# Altium PCB Solar_PowerBoard.PcbDoc
Units mm, origin at the board's own origin, x right, y up, seen from the top; angles counter-clockwise.
Board outline 33.25 x 39.86 mm, 2 copper layers (Top Layer, Bottom Layer), stack 1.639 mm thick; 25 components, 10 nets, 61 pads, 26 vias.
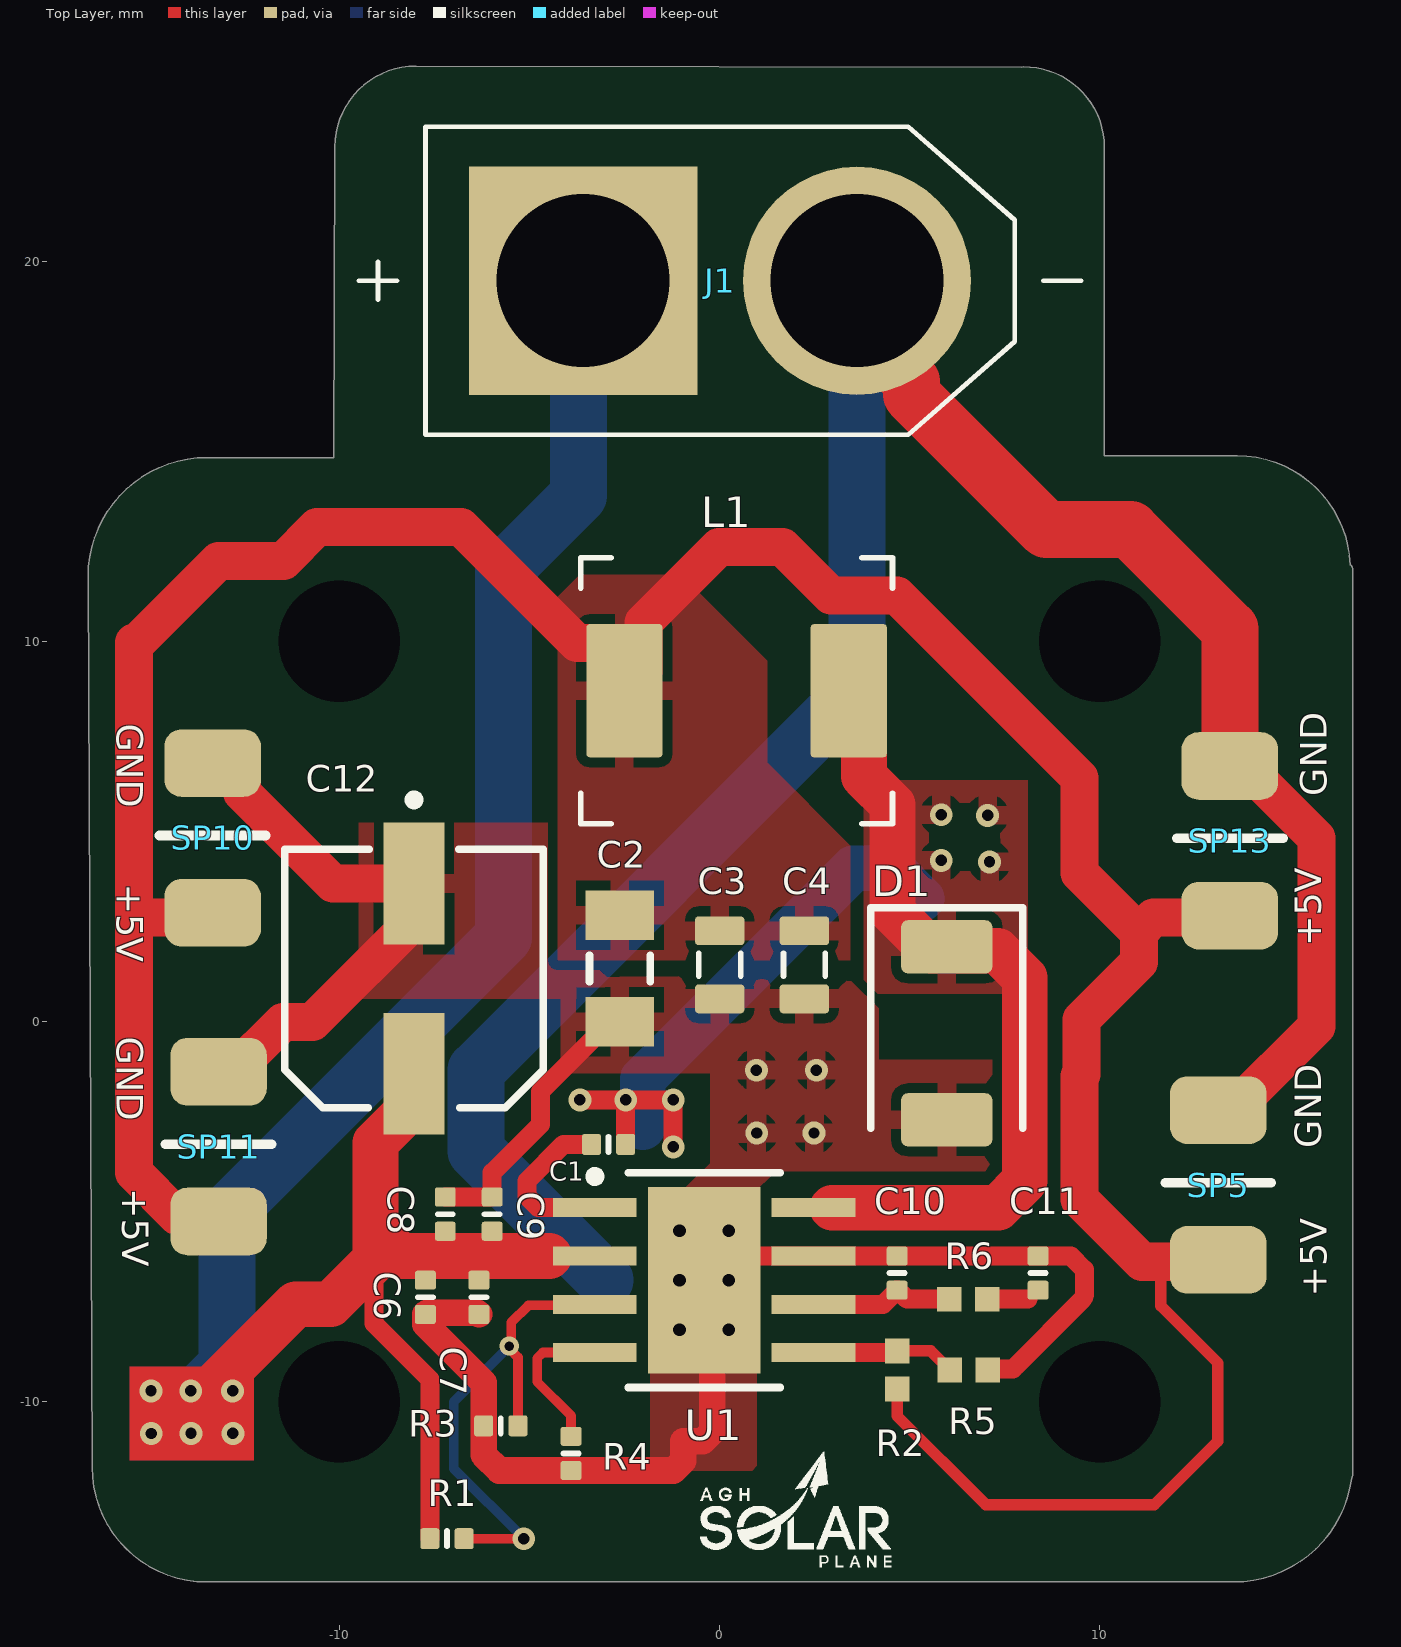
[diagram p0: Top Layer view]
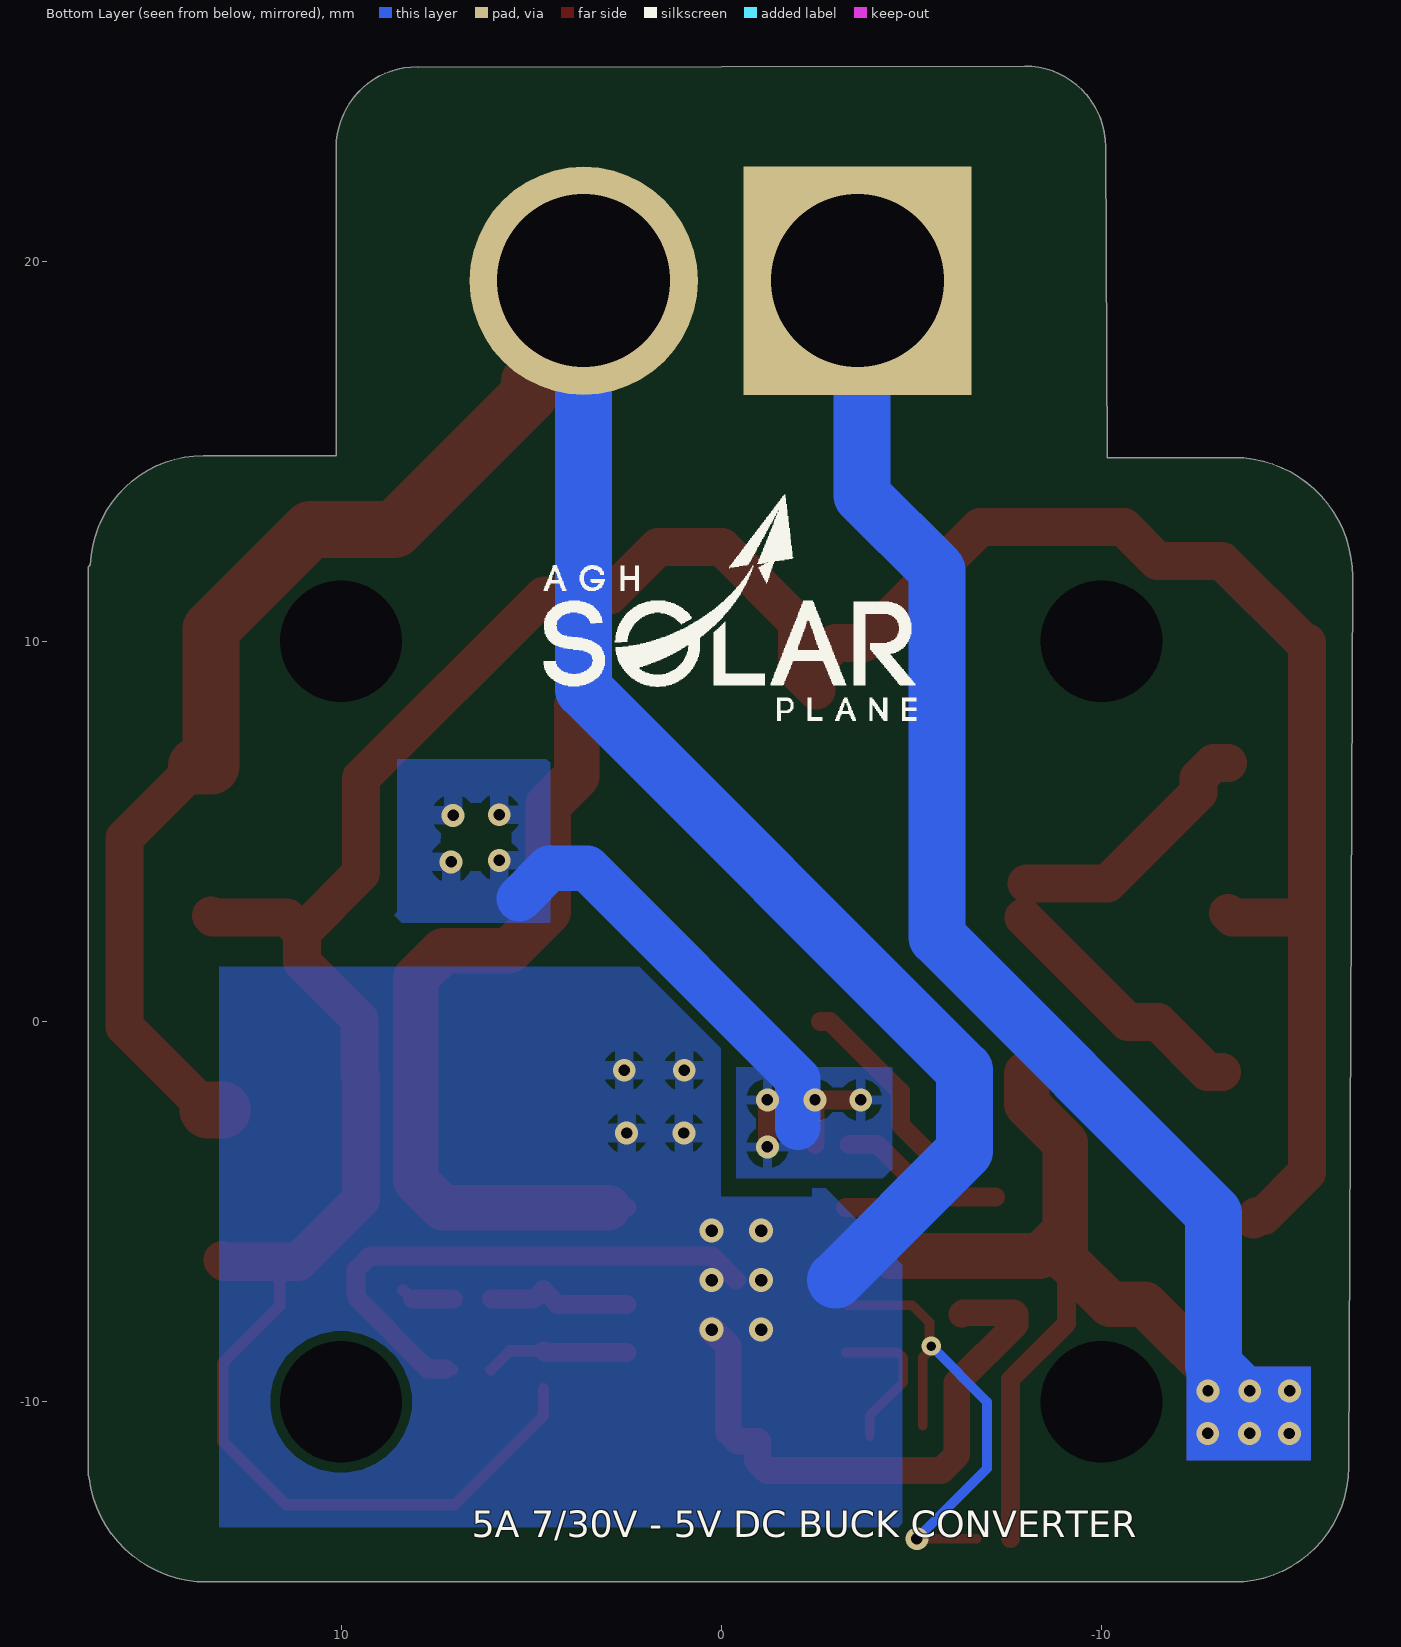
[diagram p1: Bottom Layer view, seen from below]
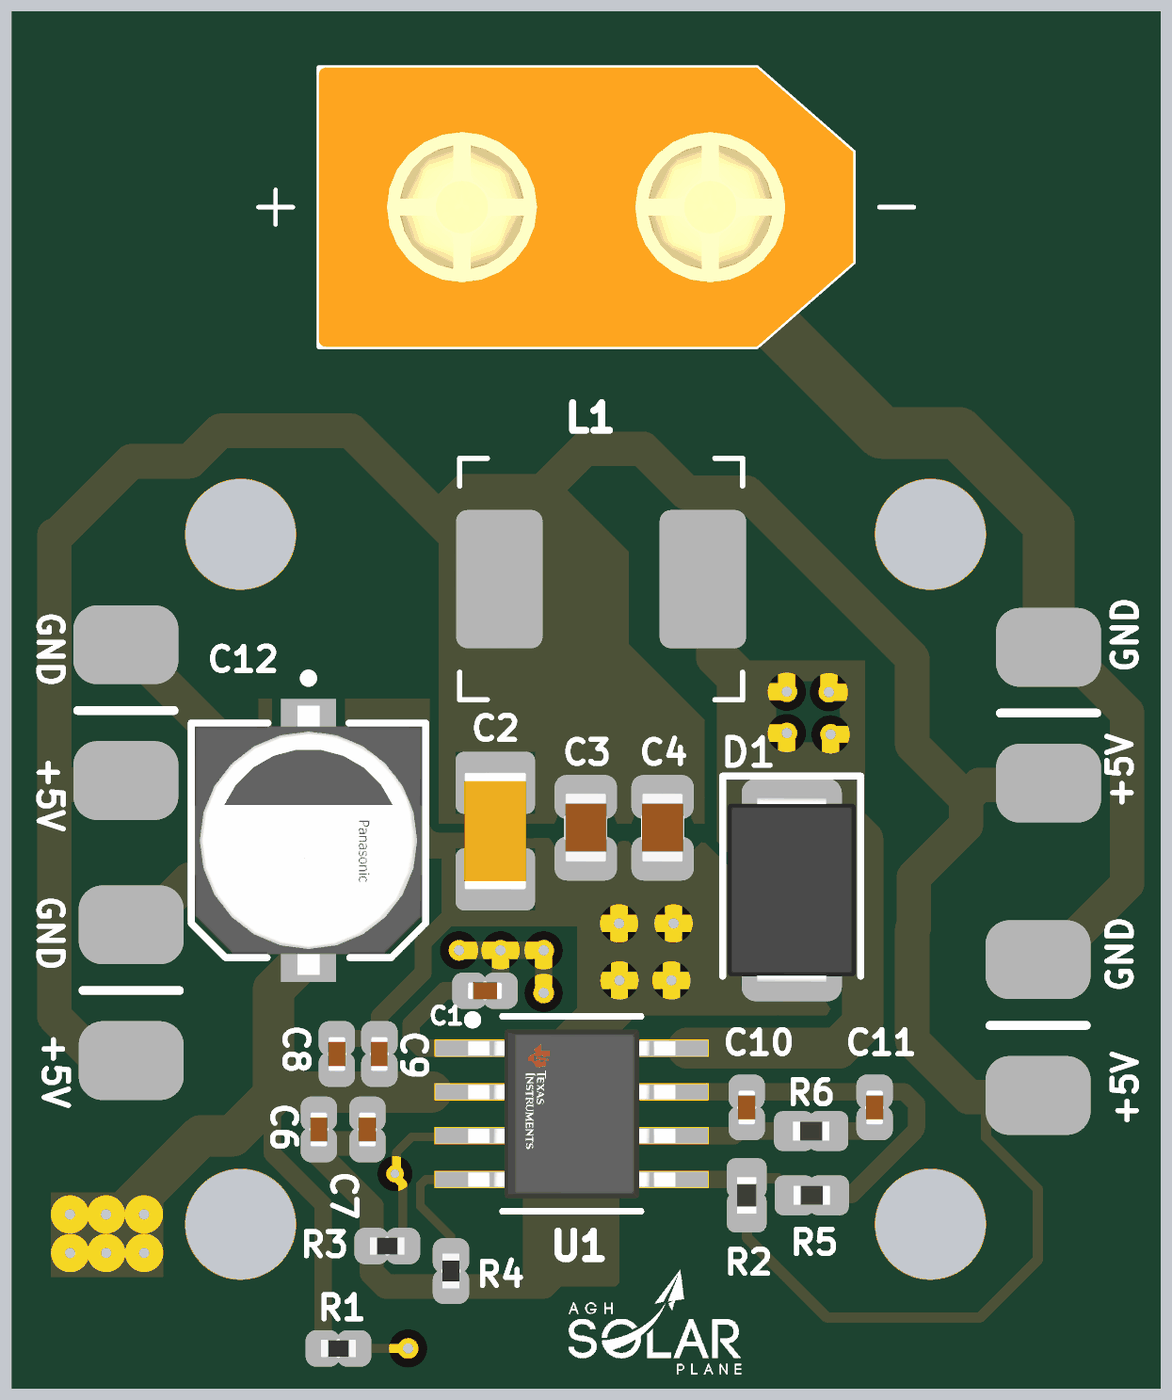
[diagram p2: 3D render of the assembled board from above, using the file's embedded part models]

## Layer stack, top to bottom
Top Solder: solder mask 0.0127, Solder Resist, Dk 3.3
Top Layer: signal copper 0.07
Dielectric1: core 1.4986, FR-4, Dk 4.3
Bottom Layer: signal copper 0.07
Bottom Solder: solder mask 0.0127, Solder Resist, Dk 3.3

## Board outline
-16.496,-11.719 -16.602,11.703 -16.602,11.704 cw(c-13.475,11.704) -13.475,14.832 -10.144,14.832 -10.11,22.995 -10.109,23.01 cw(c-7.981,23) -7.981,25.127 -7.978,25.127 7.953,25.102 7.994,25.109 cw(c8,22.981) 10.127,22.985 10.127,14.877 13.618,14.877 cw(c13.618,11.902) 16.591,12.011 cw(c16.525,11.902) 16.653,11.902 16.653,-11.933 16.627,-12.01 cw(c13.525,-11.61) 13.525,-14.737 -13.477,-14.737 cw(c-13.477,-11.719)

## Design rules (kind name [scope] priority, off if disabled: settings)
Clearance Clearance_1 [All] p1: gap=0.254 ignorepadtopadclearanceinfootprint=FALSE
Clearance [All] p2: gap=0.254 ignorepadtopadclearanceinfootprint=FALSE
DiffPairsRouting [All] p1: maxlimit=0.254 minlimit=0.254 mostfreqgap=0.254 toplayer_minwidth=0.254 toplayer_maxwidth=0.254 toplayer_prefwidth=0.254 bottomlayer_minwidth=0.254 bottomlayer_maxwidth=0.254 bottomlayer_prefwidth=0.254 maxuncoupledlength=12.7
HoleSize [All] p1: absolutevalues=TRUE maxlimit=7.62 minlimit=0.254 maxpercent=80.000 minpercent=20.000
MinimumAnnularRing [All] p1: minimumring=0
PasteMaskExpansion [All] p1: expansion=0.254
PlaneClearance [All] p1: clearance=0.381
PlaneConnect PlaneConnect_2 [All] p1: pad.planeconnectstyle=Relief pad.reliefexpansion=0.508 pad.reliefentries=4 pad.reliefconductorwidth=0.254 pad.reliefairgap=0.254 via.planeconnectstyle=Direct via.reliefexpansion=0.508 via.reliefentries=4 via.reliefconductorwidth=0.254 via.reliefairgap=0.254
PlaneConnect PlaneConnect_1 [All] p2: planeconnectstyle=Relief reliefexpansion=0.508 reliefentries=4 reliefconductorwidth=0.254 reliefairgap=0.254
PlaneConnect [All] p3: pad.planeconnectstyle=Relief pad.reliefexpansion=0.508 pad.reliefentries=4 pad.reliefconductorwidth=0.254 pad.reliefairgap=0.254 via.planeconnectstyle=Direct via.reliefexpansion=0.508 via.reliefentries=4 via.reliefconductorwidth=0.254 via.reliefairgap=0.254
PolygonConnect [InComponent('U1')] p1: connectstyle=Direct reliefconductorwidth=0.5 reliefentries=4 polygonreliefangle="90 Angle" airgapwidth=0.254
PolygonConnect PolygonConnect_1 [All] p2: connectstyle=Relief reliefconductorwidth=0.5 reliefentries=4 polygonreliefangle="90 Angle" airgapwidth=0.254
RoutingVias [All] p1: holewidth=0.5 width=0.508 viastyle="Through Hole" minholewidth=0.2 minwidth=0.2 maxholewidth=1 maxwidth=1
SMDNeckDown [All] p1: percent=100.000
SilkToSolderMaskClearance SilkscreenOverComponentPads [IsPad] p1: minsilkscreentomaskgap=0.254 clearancetoexposedcopper=TRUE
SolderMaskExpansion [All] p1: expansion=0.254 istentingtop=FALSE
SupplyNets "Schematic Supply Nets_2" [InNet('VOUT')] p1: voltage=0.000
SupplyNets "Schematic Supply Nets_1" [InNet('VIN')] p2: voltage=0.000
SupplyNets "Schematic Supply Nets" [InNet('GND')] p3: voltage=0.000
Width [All] p1: maxlimit=3 minlimit=0.254 preferedwidth=0.5 minimp=50.000000 maximp=50.000000 favimp=50.000000
24 further rules are at their usual default settings.

## Components (designator, comment, footprint, x,y, rotation, side; value= is the part's Value field where it differs from the comment)
C1 "Capacitor 100nF +/-20% 25V 0402" CAPC0402(1005)60_L -2.913,-3.231 r180 top value=100nF
C2 "Capacitor 220 uF +/- 10% 16 V 1206" CAPC3216X180X50NL20T25 -2.615,1.397 r90 top value=220µF
C3 "Capacitor 47µF +/-40% 6.3V 0805" CAPC0805(2012)145_L 0.009,1.497 r90 top value=47µF
C4 "Capacitor 47µF +/-40% 6.3V 0805" CAPC0805(2012)145_L 2.234,1.497 r90 top value=47µF
C6 "Capacitor 2,2µF +/-20% 10V 0402" CAPC0402(1005)60_L -7.731,-7.252 r90 top value=2.2µF
C7 "Capacitor 2,2µF +/-20% 10V 0402" CAPC0402(1005)60_L -6.322,-7.252 r90 top value=2.2µF
C8 "Capacitor 2,2µF +/-20% 10V 0402" CAPC0402(1005)60_L -7.208,-5.065 r270 top value=2.2µF
C9 "Capacitor 2,2µF +/-20% 10V 0402" CAPC0402(1005)60_L -5.974,-5.065 r270 top value=2.2µF
C10 "Capacitor 15pF +/-20% 10V 0402" CAPC0402(1005)60_L 4.675,-6.615 r270 top value=15pF
C11 "Capacitor 15pF +/-20% 10V 0402" CAPC0402(1005)60_L 8.382,-6.615 r270 top value=6.8nF
C12 "EEEFT1V101AP" FP-FTD-MFG -8.031,1.128 r270 top
D1 "SK54-3G" SK54-3G 6.162,-0.003 r270 top
J1 "XT60-M" AMASS_XT60-M 0.019,19.482 r0 top
L1 "Inductor 5.6uH" SUSUMU-PCMB063T_V 0.452,8.7 r180 top value=5.6µH
R1 "Resistor 90.9K +/-1 % 0402 63 mW" RESC0402(1005)_L -7.162,-13.6 r180 top value=442k
R2 "Resistor 52.3k +/-1% 0402 100 mW" RESC1005X40X25ML05T05 4.675,-9.162 r270 top value=52.3k
R3 "Resistor 90.9K +/-1 % 0402 63 mW" RESC0402(1005)_L -5.747,-10.632 r0 top value=90.9k
R4 "Resistor 121K +/-1 % 0402 63 mW" RESC0402(1005)_L -3.9,-11.357 r90 top value=121k
R5 "Resistor 10k +/-1% 0402 100 mW" RESC1005X40X25ML05T05 6.559,-9.162 r180 top value=10k
R6 "Resistor 28.7k +/-1% 0402 100 mW" RESC1005X40X25ML05T05 6.542,-7.3 r180 top value=28.7k
SP5 "5VOUT" 5VOUT 13.12,-4.236 r90 top
SP10 "5VOUT" 5VOUT -13.324,4.893 r90 top
SP11 "5VOUT" 5VOUT -13.171,-3.226 r90 top
SP13 "5VOUT" 5VOUT 13.424,4.817 r90 top
U1 "TPS54560DDA" FP-DDA0008E-MFG -0.398,-6.8 r0 top

## Footprints (in the part's own frame and the unit in brackets; to place one, negate y for a bottom-side part, rotate by r counter-clockwise, add the part's x,y. Pads: shape width x height; smd on the part's side, far side on the other; paste and mask are expansions set on the pad)
5VOUT [mil]
  rrect50% 70x100 smd: 1(-80,0) 2(75,0)
  silkscreen extent 0,-55 0,55
AMASS_XT60-M [mm]
  round 6 hole 4.55: N(3.6,0)
  rect 6x6 / inner round 6 / far side rect 6x6 hole 4.55: P(-3.6,0)
  silkscreen extent -9.5,-4.05 9.5,4.05, body extent -7.75,-4.05 7.75,4.05, height 16
CAPC0402(1005)60_L [mm] "Chip Capacitor, Body 1.0x0.5mm, Height 0.6mm, IPC High Density"
  rrect25% 0.5x0.55 smd: 1(-0.45,0) 2(0.45,0)
  silkscreen extent 0,-0.2 0,0.2, body extent -0.5,-0.25 0.5,0.25, height 0.6
CAPC0805(2012)145_L [mm] "Chip Capacitor, Body 2.0x1.2mm, Height 1.45mm, IPC High Density"
  rrect25% 0.76x1.3 smd: 1(-0.9,0) 2(0.89,0)
  silkscreen extent -0.3,-0.55 0.3,0.55, body extent -1,-0.6 1,0.6, height 1.45
CAPC3216X180X50NL20T25 [mm] "Chip Capacitor, 2-Leads, Body 3.40x1.80mm, IPC Medium Density"
  rect 1.3x1.8 smd: 1(-1.4,0) 2(1.4,0)
  silkscreen extent -0.35,-0.8 0.35,0.8, body extent -1.7,-0.9 1.7,0.9, height 1.8
FP-DDA0008E-MFG [mm]
  rect 2.2x0.5 smd paste-1000 mask+0: 1(-2.875,1.905) 2(-2.875,0.635) 3(-2.875,-0.635) 4(-2.875,-1.905) 5(2.875,-1.905) 6(2.875,-0.635) 7(2.875,0.635) 8(2.875,1.905)
  rect 2.95x4.9 smd paste-1000 mask-1000: 9(0,0)
  silkscreen extent -3,-2.83 2,2.85, body extent -4.08,-2.68 4.08,2.68, height 0.25
FP-FTD-MFG [mm]
  rect 3.2x1.6 smd paste+0 mask+0: 1(-2.5,0) 2(2.5,0)
  silkscreen extent -4.82,-3.4 3.4,3.4, body extent -4.35,-3.65 4.35,3.65, height 0.25
RESC0402(1005)_L [mm] "Chip Resistor, Body 1.0x0.5mm, IPC High Density"
  rrect25% 0.5x0.55 smd: 1(-0.45,0) 2(0.45,0)
  silkscreen extent 0,-0.2 0,0.2, body extent -0.5,-0.25 0.5,0.25, height 0.3
RESC1005X40X25ML05T05 [mm] "Chip Resistor, 2-Leads, Body 1.05x0.55mm, IPC Low Density"
  rect 0.65x0.65 smd: 1(-0.5,0) 2(0.5,0)
  body extent -0.53,-0.28 0.53,0.28, height 0.4
SK54-3G [mm]
  rrect25% 1.4x2.4 smd: 1(2.582,-0.184) 2(-1.968,-0.184)
  silkscreen extent -2.99,-2.18 2.81,1.82, body extent -2.39,-2.03 3.01,1.67, height 2.18
SUSUMU-PCMB063T_V [mm] "SMD, 2-Leads, Body 7.8x6.7mm"
  rrect8% 2x3.5 smd: 1(-2.95,0) 2(2.95,0)
  silkscreen extent -4.1,-3.5 4.1,3.5, body extent -3.65,-3.4 3.65,3.4, height 3

## Part data
C1: library part CMP-001-00065-4, "Chip Capacitor, 100nF +/-20%, 25V, 0402, Thickness 0.6 mm", Case/Package=0402, Max Operating Temperature=85°C, Min Operating Temperature=-55°C, Tolerance=10%, Voltage Rating=25V, Mounting Technology=SMT, Pins=2
C2: library part CMP-001-00088-1, "Chip Capacitor, 220 uF, +/- 10%, 16 V, 1206 (3216 Metric)", Capacitor Type=Ceramic, Case/Package=1206, Max Operating Temperature=125°C, Min Operating Temperature=-55°C, Tolerance=10%, Voltage Rating=16V, Mounting Technology=SM, Pins=2, RoHS Compliant=True
C3 C4: library part CMP-001-00082-4, "Chip Capacitor, 47µF +/-40%, 6.3V, 0805, Thickness 1.45 mm", Case/Package=0805, Max Operating Temperature=85°C, Min Operating Temperature=-55°C, Tolerance=10%, Voltage Rating=6.3V, Mounting Technology=SMT, Pins=2
C6 C7 C8 C9: library part CMP-001-00056-4, "Chip Capacitor, 2,2µF +/-20%, 10V, 0402, Thickness 0.6 mm", Case/Package=0402, Max Operating Temperature=85°C, Min Operating Temperature=-55°C, Tolerance=10%, Voltage Rating=10V, Mounting Technology=SMT, Pins=2
C10 C11: library part CMP-001-00087-1, "Chip Capacitor, 15pF +/-20%, 10V, 0402, Thickness 0.6 mm", Case/Package=0402, Max Operating Temperature=85°C, Min Operating Temperature=-55°C, Tolerance=20%, Voltage Rating=10V, Mounting Technology=SMT, Pins=2
C12: library part CMP-05427-000027-1, "CAP ALUM 100UF 20% 35V SMD", Capacitance=100uF, Case/Package=Radial, ESR (Equivalent Series Resistance)=260mR, Leakage Current=35uA, Max Operating Temperature=105°C, Min Operating Temperature=-55°C, Package Quantity=1000, Ripple Current=300mA, Tolerance=20%, Voltage=35V, Construction=Cylindrical, Contact Plating=Tin, Diameter=6.3mm, Height=5.8mm, Height - Seated (Max)=0.24inch, Lead Diameter=0.65mm, Lead Pitch=1.8mm, Length=5.8mm, Life (Hours)=2000Hour, Mount="Surface Mount", Number of Pins=2, Packaging="Tape and Reel", Polarity=Polar, Radiation Hardening=No, REACH SVHC="No SVHC", Ripple Current (AC)=300mA, RoHS Compliant=Yes, Series=FT, Termination=SMD/SMT, Voltage Rating=35V, Voltage Rating (DC)=35V
D1: library part Diode
J1: library part CMP-009-000000-1, "Plug; DC supply; XT60; male; PIN: 2; for cable; soldered; 30A; 500V", Package=Package, Check_prices=https://www.snapeda.com/parts/XT60-M/AMASS/view-part/?ref=eda, Component Type=Standard, Design Item ID=XT60-M, MF=AMASS, MP=XT60-M, Pin Count=2, SnapEDA_Link=https://www.snapeda.com/parts/XT60-M/AMASS/view-part/?ref=snap, Source=XT60-M.SchLib
L1: library part CMP-006-00023-1, "Shielded Wirewound Inductor, 5.6 uH, +/- 20%, -20 to 120 degC, 2-Pin SMD, RoHS, Tape and Reel", Case/Package=SMD/SMT, Tolerance=20%, Pins=2
R1 R3: library part CMP-009-00181-1, "Chip Resistor, 90.9 kOhms, +/-1 %, 63 mW, -55 to 155 degC, 0402", Case/Package=0402, Max Operating Temperature=155°C, Min Operating Temperature=-55°C, Power=63mW, Tolerance=1%, Pins=2
R2: library part CMP-009-00183-2, "Chip Resistor, 52.3 KOhm, +/- 1%, 0.1 W, -55 to 155 degC, 0402 (1005 Metric)", Case/Package=0402, Max Operating Temperature=155°C, Min Operating Temperature=-55°C, Power=100mW, Tolerance=1%, Voltage Rating=50V, Mounting Technology=SM, Pins=2, RoHS Compliant=True
R4: library part CMP-009-00133-3, "Chip Resistor, 121 kOhms, +/-1 %, 63 mW, -55 to 155 degC, 0402", Case/Package=0402, Max Operating Temperature=155°C, Min Operating Temperature=-55°C, Power=63mW, Tolerance=1%, Pins=2
R5: library part CMP-009-00015-5, "Chip Resistor, 10 KOhm, +/- 1%, 0.1 W, -55 to 155 degC, 0402 (1005 Metric)", Case/Package=0402, Max Operating Temperature=155°C, Min Operating Temperature=-55°C, Power=100mW, Tolerance=1%, Voltage Rating=50V, Mounting Technology=SM, Pins=2, RoHS Compliant=True
R6: library part CMP-009-00182-1, "Chip Resistor, 28.7 KOhm, +/- 1%, 0.1 W, -55 to 155 degC, 0402 (1005 Metric)", Case/Package=0402, Max Operating Temperature=155°C, Min Operating Temperature=-55°C, Power=100mW, Tolerance=1%, Voltage Rating=50V, Mounting Technology=SM, Pins=2, RoHS Compliant=True
U1: library part CMP-04918-000033-1, "IC REG BCK SPLIT RAIL ADJ 8SOPWR", Manufacturer="Texas Instruments", Max Junction Temp=+150°C, Max Supply Voltage=60V, Min Supply Voltage=4.5V, Nominal Supply Current=146uA, Output Current=5A, Output Voltage=0.8-58.8V, Package=DDA0008E, Switching Frequency=100-2500kHz, Temperature="-40°C to +125°C", Temperature Range High=+125°C, Temperature Range Low=-40°C, Automotive=No, Category=IC, ComponentLink2Description=Datasheet, ComponentLink2URL=http://www.ti.com/lit/ds/symlink/tps54560.pdf, Device Class L1="Integrated Circuits (ICs)", Device Class L2="Power Management ICs", Device Class L3="Voltage Regulators - Switching", Digikey Description="IC REG BCK SPLIT RAIL ADJ 8SOPWR", Height=1.7mm, Ipc Land Pattern Name=SOIC127P600X170-8, Lead Free=Yes, Manufacturer Part Number=TPS54560DDA, Max Duty Cycle=100%, Mouser Description="Voltage Regulators - Switching Regulators 60V Input 5 A SD DC-DC Cnvtr", Number Of Outputs=1, Octopart=https://octopart.com/tps54560dda-texas+instruments-26977150, Output Type=AdjustableProgrammable, RoHS=TRUE, Standoff Height=0mm, Switching Topology=Buck

## Free pads (board coordinates)
  round 1.524 hole 3.2: 5(-10,10) 6(10,10) 7(10,-10) 8(-10,-10)

## Via types
v1: diameter 0.6, hole 0.3, Top Layer to Bottom Layer, 19 vias
v2: diameter 0.63, hole 0.33, Top Layer to Bottom Layer, 6 vias
v3: diameter 0.508, hole 0.254, Top Layer to Bottom Layer, 1 vias

## Nets (pads, with @x,y where several pads share a name; then routed paths per layer and width w, separated by ;. In a path a pad name is that pad's centre, name@x,y a point inside that pad or via, vN(x,y) a via of type N, cw(c..) or ccw(c..) an arc to the next point about the centre after c; other vN are vias at no path point)
COMP: C10.2 R6.2 U1.6 | length 3.8
  Top Layer w0.5: U1.6 4.305,-7.435 4.65,-7.09 4.65,-7.065 4.7,-7.065 4.935,-7.3 R6.2
FB: R2.1 R5.2 U1.5 | length 3.8
  Top Layer w0.3: R2.1 5.559,-8.662 R5.2
  Top Layer w0.5: U1.5 4.632,-8.705 R2.1
GND: C2.1 C3.1 C4.1 C6.1 C7.1 C8.1 C9.1 C10.1 C11.1 C12.1 D1.1 J1.N R3.1 R4.1 R5.1 SP5.2 SP10.2 SP11.2 SP13.2 U1.7 U1.9 | length 112.6
  Top Layer w0.3: R5.1 R5.1@7.234,-9.137 ; 7.719,-9.137 7.808,-9.047
  Top Layer w0.5: C8.1 C9.1 -5.974,-3.975 -4.709,-2.71 -4.709,-1.846 -2.865,-0.003 C2.1 ; U1.9 0.237,-6.165 U1.7 C10.1 C11.1 9.241,-6.165 9.6,-6.524 9.6,-7.157 cw(c9.378,-7.157) 9.535,-7.313 7.808,-9.047 ; R5.1@7.234,-9.137 7.719,-9.137
  Top Layer w0.7: C7.1 -6.368,-7.656 -7.685,-7.656 C6.1 -7.731,-7.961 -6.197,-9.495 R3.1 -6.197,-11.397 -5.787,-11.807 R4.1 -1.208,-11.807 -0.952,-11.551 -0.952,-11.039 -0.439,-11.039 -0.183,-10.782 -0.183,-8.535 v2(0.252,-8.1)
  Top Layer w1: SP10.2 -12.943,6.798 -12.555,6.409 -12.555,6.028 -10.155,3.628 C12.1 ; SP11.2 -12.79,-1.321 -11.481,-0.013 -10.7,-0.013 C12.1@-7.945,2.742 ; SP5.2@13.501,-2.331 15.698,-0.134 15.698,4.829 SP13.2@13.805,6.722
  Top Layer w1.5: J1.N 3.619,18.264 5.049,16.834 5.049,16.487 8.597,12.939 10.807,12.939 13.424,10.322 SP13.2 SP13.2@13.805,6.722 ; SP5.2 SP5.2@13.501,-2.331
  Bottom Layer w1.5: -3.004,-6.8 -6.395,-3.409 -6.395,-1.28 3.619,8.733 J1.N
  other v1: 0.984,-2.931 2.489,-2.931 0.973,-1.28 2.553,-1.28
  other v2: -1.048,-8.1 -1.048,-6.8 0.252,-6.8 -1.048,-5.5 0.252,-5.5
NetC1_1: C1.1 D1.2 L1.1 U1.8 | length 37.7
  Top Layer w0.5: v1(-3.667,-2.06) v1(-2.463,-2.06) ; C1.1 v1(-2.463,-2.06) ; v1@-1.241,-3.296 v1(-1.214,-3.296) v1(-1.214,-2.06) v1(-2.463,-2.06) ; U1.8 U1.8@2.939,-4.895
  Top Layer w1.2: U1.8@2.977,-4.895 7.328,-4.895 8.032,-4.19 8.032,1.146 7.313,1.865 5.578,1.865 4.552,2.891 4.552,5.703 3.802,6.453 3.802,8.3 L1.1
  Bottom Layer w1.2: -2.013,-2.781 -2.013,-1.511 3.527,4.029 4.521,4.029 5.316,3.233
  other v1: 7.104,4.2 5.837,4.238 7.053,5.422 5.837,5.436
NetC1_2: C1.2 U1.1 | length 4.4
  Top Layer w0.5: C1.2 -4.099,-3.231 -5.056,-4.188 -5.056,-4.602 -4.763,-4.895 U1.1
NetC11_2: C11.2 R6.1 | length 1.4
  Top Layer w0.3: 8.122,-7.3 8.357,-7.065 C11.2
  Top Layer w0.5: R6.1 8.122,-7.3
NetR1_1: R1.1 R3.2 U1.3 | length 13.2
  Top Layer w0.254: R1.1 v1(-5.143,-13.6) ; R3.2 -5.297,-8.83 -5.524,-8.604 v3(-5.524,-8.535) -5.475,-8.486 -5.475,-7.915 -5.025,-7.465 -3.303,-7.465 U1.3
  Bottom Layer w0.254: v3(-5.524,-8.535) -6.989,-10 -6.989,-11.754 v1(-5.143,-13.6)
NetR4_2: R4.2 U1.4 | length 4
  Top Layer w0.254: R4.2 -3.9,-10.364 -4.789,-9.475 -4.789,-8.854 -4.64,-8.705 U1.4
VIN: C6.2 C7.2 C8.2 C9.2 C12.2 J1.P R1.2 U1.2 | length 63
  Top Layer w0.5: v1(-14.946,-9.715) v1(-13.9,-9.715) -13.42,-9.715 v1(-12.8,-9.715) ; v1(-14.941,-10.834) -14.939,-10.832 -13.897,-10.832 v1(-13.895,-10.831) v1(-12.795,-10.831) ; -9.078,-6.13 -9.078,-6.285 -9.078,-7.947 -7.604,-9.42 R1.2@-7.604,-13.6
  Top Layer w1.2: -13.683,-9.977 -13.42,-9.715 -11.141,-7.435 -10.228,-7.435 -9.078,-6.285 -9.043,-6.25 -9.043,-5.497 ; C12.2 -8.031,-2.172 -9.043,-3.183 -9.043,-5.497 ; -4.473,-6.165 -7.731,-6.165 -8.375,-6.165 -9.043,-5.497
  Bottom Layer w1.5: -14.261,-10.357 -12.943,-9.04 -12.943,-5.044 -5.674,2.225 -5.674,11.862 -3.705,13.831 -3.705,19.358 J1.P
VOUT: C2.2 C3.2 C4.2 L1.2 R2.2 SP5.1 SP10.1 SP11.1 SP13.1 | length 86.7
  Top Layer w0.3: SP11.1@-13.324,-5.498 -13.103,-5.498 SP11.1@-12.649,-5.044 ; R2.2 4.675,-10.374 7.003,-12.702 11.441,-12.702 13.111,-11.032 13.111,-8.98 11.61,-7.48 11.61,-6.431 11.496,-6.317
  Top Layer w1: SP11.1@-14,-5.203 -14.094,-5.109 -14.261,-5.109 -15.397,-3.973 -15.397,2.739 ; SP10.1 -13.446,2.739 -15.397,2.739 ; L1.2 -1.998,9.2 -1.998,10.497 -0.015,12.48 1.66,12.48 2.936,11.204 4.668,11.204 9.472,6.4 9.472,3.905 11.03,2.347 ; L1.2@-2.498,9.45 -2.998,9.95 -3.748,9.95 -6.798,13 -10.584,13 -11.468,12.116 -13.171,12.116 -15.318,9.968 -15.397,9.968 -15.397,2.739 ; SP5.1 13.071,-6.317 11.496,-6.317 11.115,-6.317 9.472,-4.674 9.472,-1.439 9.519,-1.392 9.519,0.054 11.03,1.565 11.03,2.347 ; SP13.1 13.375,2.736 11.419,2.736 11.03,2.347

## Polygon pours and split planes (outlines as drawn)
GND on Top Layer "GND_L01_P000" (solid, pour order 0): -4.175,-1.364 -0.241,-1.364 -0.241,-4.506 1.289,-3 3.8,-3.04 4.186,-3.04 4.186,0.351 3.29,1.238 -4.175,1.165
VOUT on Top Layer "VOUT_L01_P006" (solid, pour order 6): -4.254,1.612 3.448,1.612 3.448,4.625 1.257,6.816 1.257,9.49 -1.003,11.75 -3.677,11.75 -4.254,11.173
GND on Top Layer "GND_L01_P007" (solid, pour order 7): -2.383,0.597 -9.481,0.597 -9.481,5.234 -3.564,5.234 -3.564,1.778
GND on Top Layer "GND_L01_P009" (solid, pour order 9): 0.404,-0.999 7.994,-0.999 7.994,-3.943 0.167,-3.943
GND on Top Layer "GND_L01_P018" (solid, pour order 18): -1.715,-4.513 -1.03,-4.513 -0.048,-3.531 -0.045,-3.534 1.743,-3.534 1.743,-3.672 0.7,-4.715 0.587,-4.602 -1.062,-4.602
GND on Top Layer "GND_L01_P021" (solid, pour order 21): -1.815,-11.807 0.864,-11.807 0.984,-11.688 0.984,-11.388 0.984,-8.662 -1.772,-8.662 -1.815,-8.705 -1.815,-9.3
NetC1_1 on Top Layer "NETC1_1_L01_P022" (solid, pour order 22): 8.107,6.347 8.107,0.731 3.802,0.731 3.802,6.347
NetC1_1 on Bottom Layer "NETC1_1_L02_P014" (solid, pour order 14): -4.5,-4.125 -0.398,-4.125 -0.398,-1.2 -4.5,-1.2 -4.5,-1.6
GND on Bottom Layer "GND_L02_P020" (solid, pour order 20): -2.398,-4.602 0.015,-4.602 0.015,1.44 13.197,1.44 13.197,-13.304 -4.763,-13.304 -4.763,-6.401 -2.398,-4.036
NetC1_1 on Bottom Layer "NETC1_1_L02_P023" (solid, pour order 23): 4.5,2.6 8.4,2.6 8.6,2.8 8.519,2.881 8.519,6.9 4.6,6.9 4.5,6.8 4.5,5.9

## Other copper
Top Layer:
  region net VIN: -12.243,-11.531 -12.243,-9.082 -15.5,-9.082 -15.5,-11.531
Bottom Layer:
  region net VIN: -12.243,-9.082 -12.243,-11.531 -15.5,-11.531 -15.5,-9.082

## Silkscreen, mask and mechanical layers (free items; w line width, h text height)
Top Overlay:
  drawing of 17 lines, arcs and shapes, not listed
Bottom Overlay:
  drawing of 17 lines, arcs and shapes, not listed
  text "5A 7/30V - 5V DC BUCK CONVERTER" at 6.559,-13.8 h1.2
Board:
  lines w0.254: -10.017,14.783 -9.982,22.994 ; -10,14.783 -10,14.704 -13.475,14.704 ccw(c-13.475,11.704) -16.475,11.704 -16.368,-11.719 ccw(c-13.477,-11.719) -13.477,-14.61 13.525,-14.61 ccw(c13.525,-11.61) 16.525,-11.61 ; -9.981,22.994 cw(c-7.981,23) -7.981,25 7.994,24.974 ; 7.994,24.981 cw(c8,22.981) 10,22.981 ; 10,22.985 10,14.808 ccw(c10.058,14.808) 10.058,14.75 ; 10.062,14.75 13.618,14.75 cw(c13.618,11.902) 16.466,11.902 16.525,11.902 16.525,-11.933
Dimensions:
  lines w0.254: -16.475,-0.01 16.525,-0.01 ; 0,-14.75 0,14.75 ; -10,10 10,10 ; -10,10 -10,-10 10,-10 10,10 ; -10,10 -10,25 10,25 10,10 ; -16.475,-14.75 -16.475,14.783 16.525,14.783 16.525,-14.75 -16.475,-14.75

## Text inside footprints (layer, text, board x,y; h text height)
SP5: Top Overlay "GND" at 15.824,-3.335 h0.7 r90; Top Overlay "+5V" at 15.974,-7.236 h0.7 r90
SP10: Top Overlay "GND" at -15.85,7.831 h0.7 r270; Top Overlay "+5V" at -15.85,3.628 h0.7 r270
SP11: Top Overlay "GND" at -15.85,-0.4 h0.7 r270; Top Overlay "+5V" at -15.7,-4.388 h0.7 r270
SP13: Top Overlay "GND" at 15.974,5.919 h0.7 r90; Top Overlay "+5V" at 15.824,1.977 h0.7 r90